# Altium PCB ANTS-MotorBoard.PcbDoc (part 1 of 3)
Units mm, origin at the board's own origin, x right, y up, seen from the top; angles counter-clockwise.
Board outline 50 x 50 mm, 2 copper layers (Top Layer, Bottom Layer); 2 components, 10 nets, 26 pads, 0 vias.
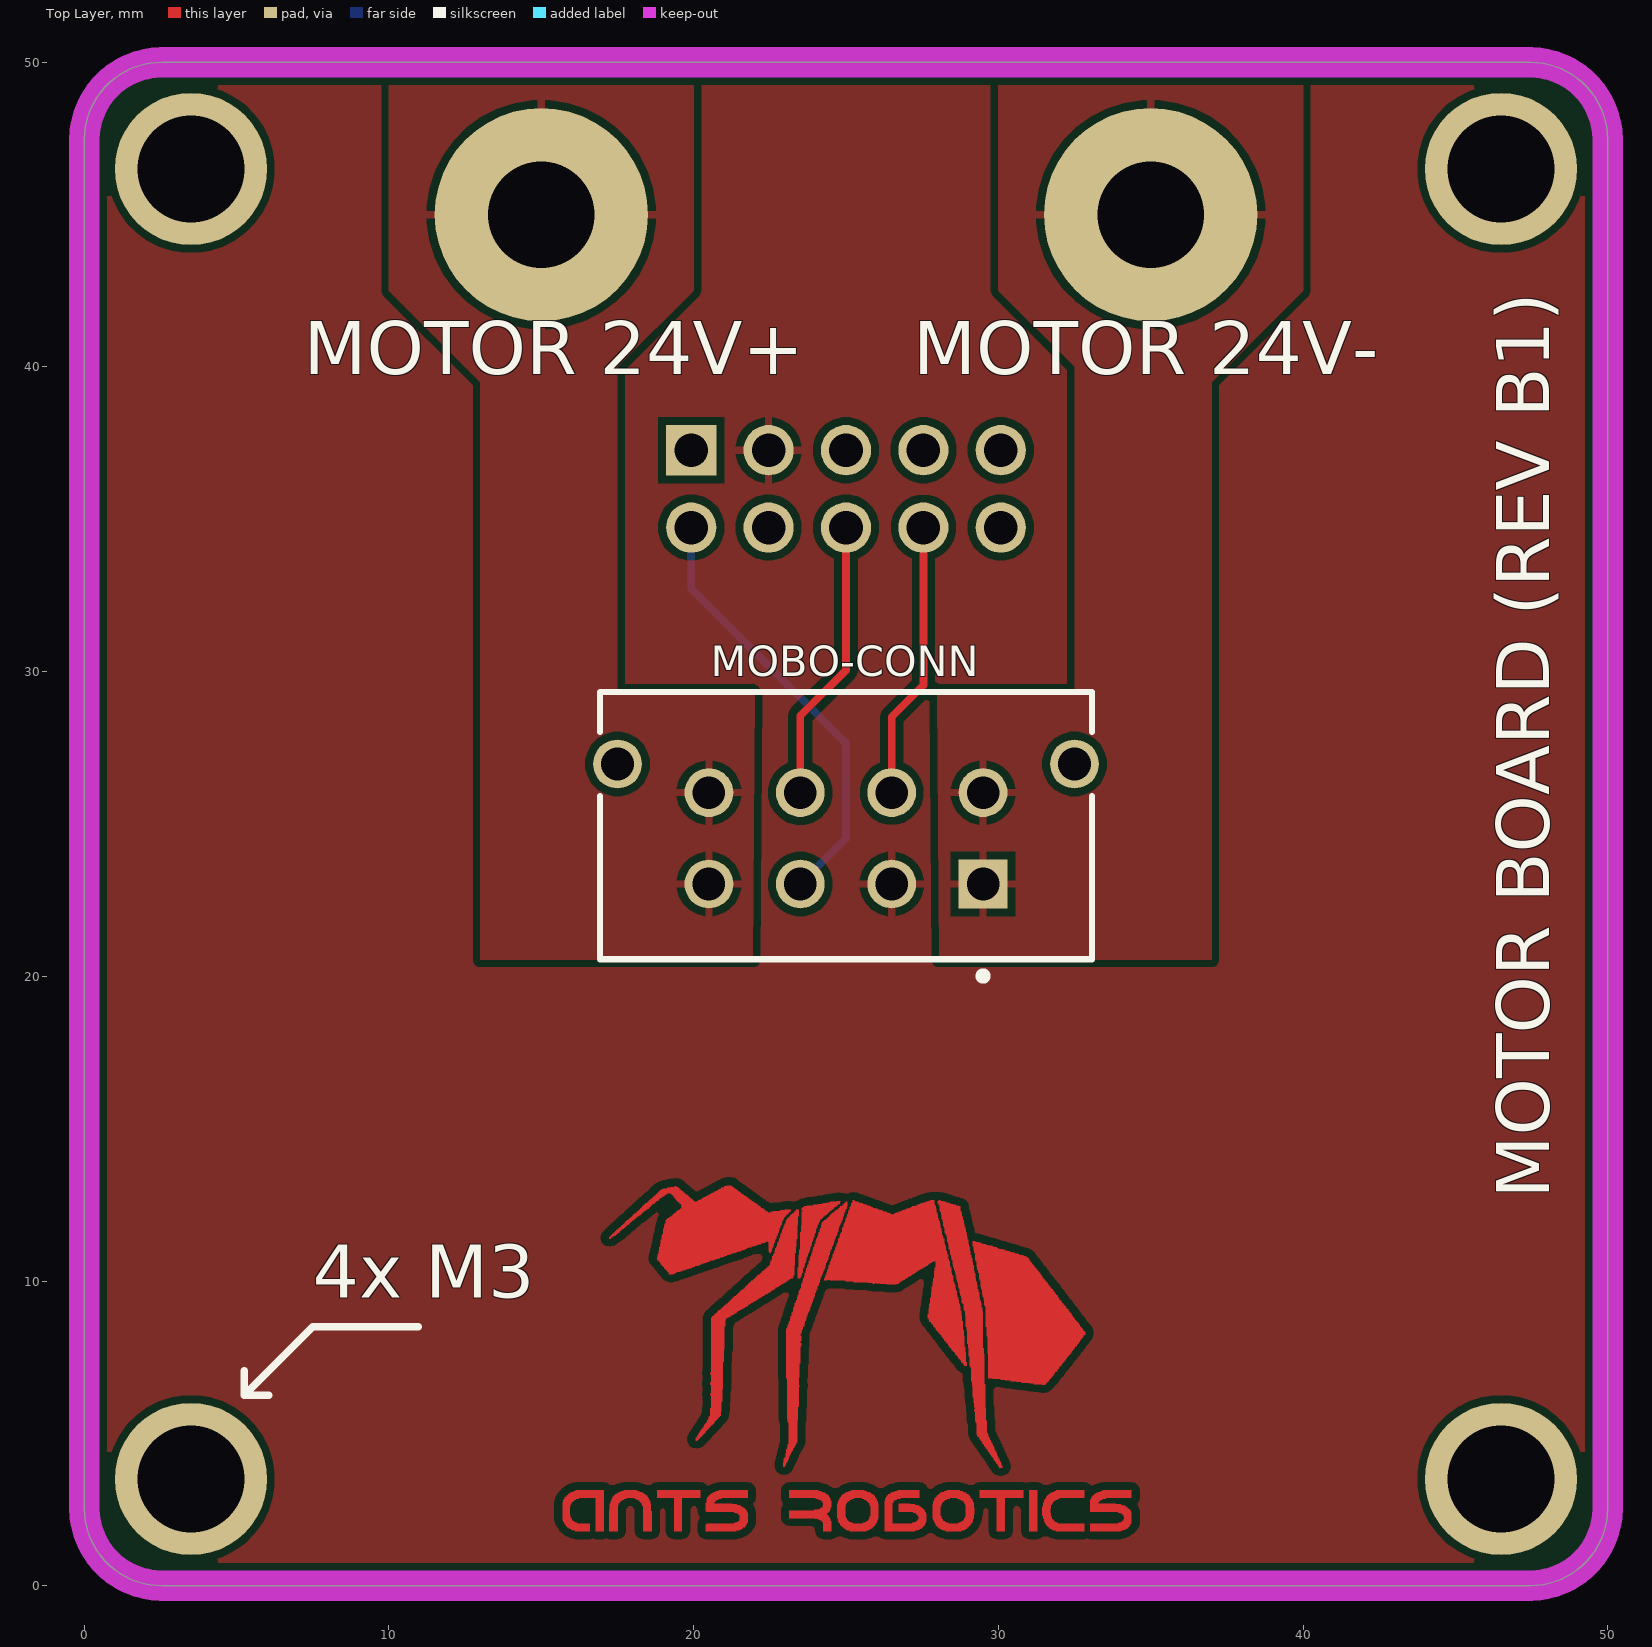
[diagram p0: Top Layer view]
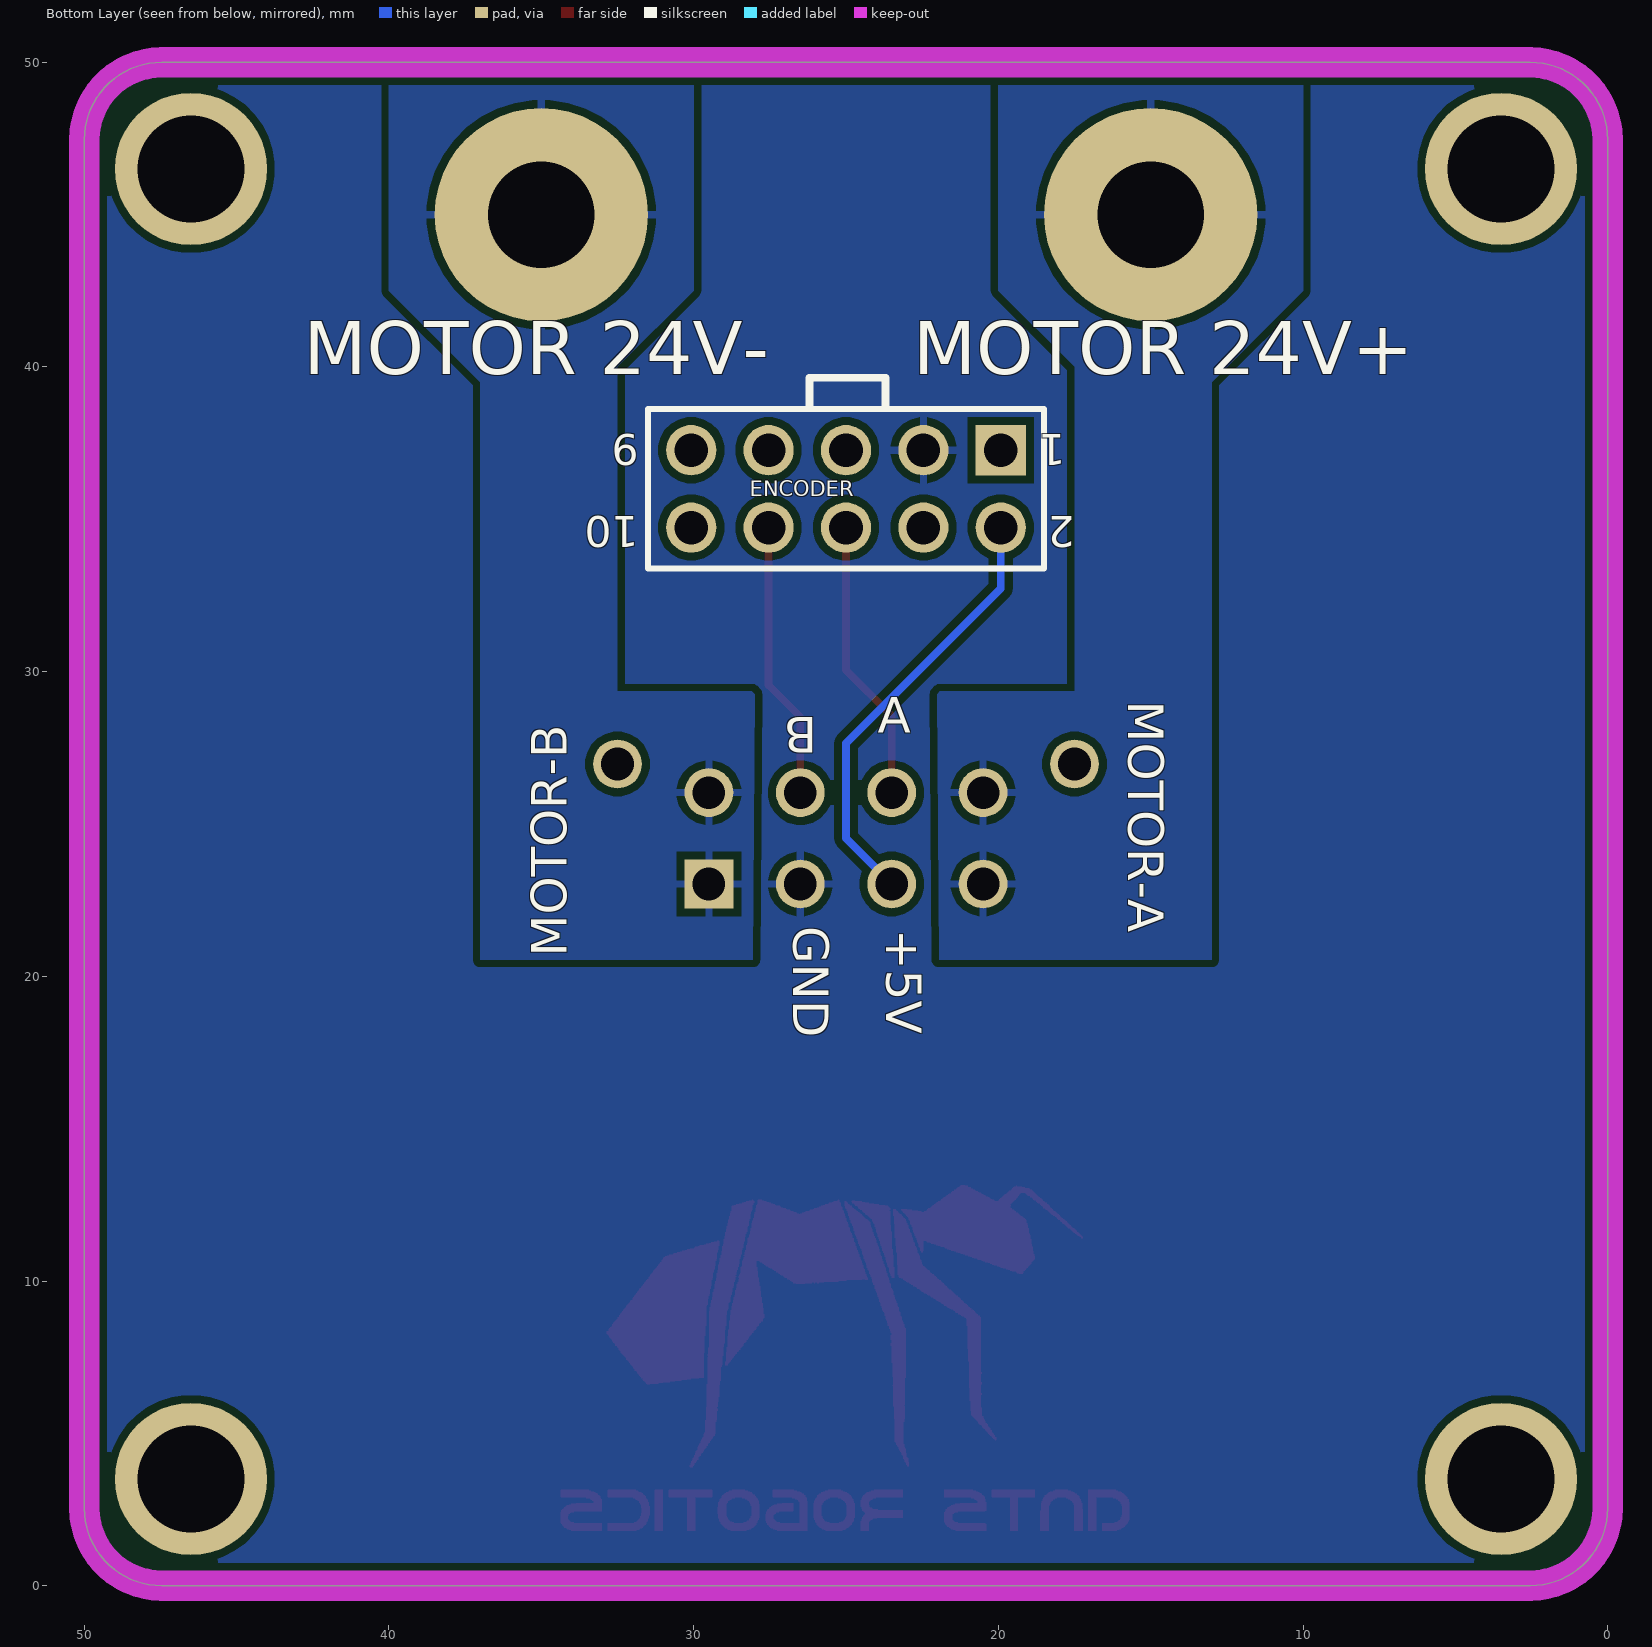
[diagram p1: Bottom Layer view, seen from below]

## Layer stack, top to bottom
Top Solder: solder mask 0.0102, Solder Resist, Dk 3.5
Top Layer: signal copper 0.0356
Dielectric 1: dielectric 0.32, FR-4, Dk 4.8
Bottom Layer: signal copper 0.0356
Bottom Solder: solder mask 0.0102, Solder Resist, Dk 3.5

## Board outline
47,0 47.46,0 ccw(c47.46,2.54) 50,2.54 50,3 50,47.46 ccw(c47.46,47.46) 47.46,50 47,50 3,50 2.54,50 ccw(c2.54,47.46) 0,47.46 0,2.54 ccw(c2.54,2.54) 2.54,0 3,0

## Design rules (kind name [scope] priority, off if disabled: settings)
Clearance [All] p1: gap=0.254 ignorepadtopadclearanceinfootprint=FALSE except(0: Arc-Hole Track-Hole SMDPad-Hole THPad-Hole Via-Hole Fill-Hole Poly-Hole Region-Hole Text-Hole)
PolygonConnect [All] p1: connectstyle=Relief reliefconductorwidth=0.254 reliefentries=4 polygonreliefangle="90 Angle" airgapwidth=0.254
RoutingVias [All] p1: holewidth=0.711 width=1.27 viastyle="Through Hole" minholewidth=0.711 minwidth=1.27 maxholewidth=0.711 maxwidth=1.27
SolderMaskExpansion [All] p1: expansion=0.102 istentingtop=FALSE
Width [All] p1: maxlimit=0.254 minlimit=0.254 preferedwidth=0.254
30 further rules are at their usual default settings.

## Components (designator, comment, footprint, x,y, rotation, side; value= is the part's Value field where it differs from the comment)
ENCODER "61301021121" 61301021121 25,36 r0 bottom
MOBO-CONN "43045-0812" MOLX-43045-0812_V 25,25 r180 top

## Footprints (in the part's own frame and the unit in brackets; to place one, negate y for a bottom-side part, rotate by r counter-clockwise, add the part's x,y. Pads: shape width x height; smd on the part's side, far side on the other; paste and mask are expansions set on the pad)
61301021121 [mm] "Pin Header, pitch 2.54 mm, THT, Vertical, dual row, 10p"
  rect 1.65x1.65 hole 1.1: 1(-5.08,-1.27)
  round 1.65 hole 1.1: 2(-5.08,1.27) 3(-2.54,-1.27) 4(-2.54,1.27) 5(0,-1.27) 6(0,1.27) 7(2.54,-1.27) 8(2.54,1.27) 9(5.08,-1.27) 10(5.08,1.27)
  silkscreen extent -6.5,-2.62 6.5,2.62, body extent -6.35,-2.54 6.35,2.54, height 8.59
MOLX-43045-0812_V [mm] "PCB Header, 8-Leads, Vertical, Pitch 3 mm, Mated Height 17.27 mm, Through Hole"
  rect 1.6x1.6 hole 1.07: 1(-4.5,1.97)
  round 1.6 hole 1.07: 2(-1.5,1.97) 3(1.5,1.97) 4(4.5,1.97) 5(-4.5,-1.03) 6(-1.5,-1.03) 7(1.5,-1.03) 8(4.5,-1.03) MH1(-7.5,-1.97) MH2(7.5,-1.97)
  silkscreen extent -8.08,-4.33 8.08,5.11, body extent -8.08,-4.33 8.08,4.44, height 9.91

## Part data
ENCODER: library part CMP-1502-01084-1, "THT Vertical Pin Header WR-PHD, Pitch 2.54 mm, Dual Row, 10 pins", Contact Resistance=20mOhm, Manufacturer="Wurth Elektronik", Operating Temperature=-40to105degC, Rated Current=3A, Withstanding Voltage=500VAC, Working Voltage=250VAC, Datasheet URL=https://katalog.we-online.de/em/datasheet/6130xx21121.pdf, Gender=Male, Manufacturer URL=http://www.we-online.de, Mounting Technology=THT, Orientation=Vertical, Package Reference=61301021121, Packaging=Bag, Part Number=61301021121, Pin Number=10, Pitch=2.54mm, Publisher=WurthElektronik, Row Number=Dual
MOBO-CONN: library part CMP-1594-00003-1, "3 mm Pitch Micro-Fit 3.0 Connector, 17.27 mm Mated Height, Vertical, Through Hole, 8 Circuits, -40 to 105 degC, RoHS, Tray", Temperature Max="105 degC", Temperature Min="-40 degC", ComponentLink1Description="Manufacturer URL", ComponentLink1URL=http://www.molex.com/, ComponentLink2Description=Datasheet, ComponentLink2URL=http://www.molex.com/webdocs/datasheets/pdf/en-us/0430450812_PCB_HEADERS.pdf, ComponentLink3Description="Package Specification", ComponentLink3URL=http://www.molex.com/pdm_docs/sd/430450812_sd.pdf, Mounting Technology="Through Hole", No. of Positions=8, No. of Rows=2, Orientation=Vertical, PackageDescription="8-Pin PCB Header, Vertical, Pitch 3 mm, Mated Height 17.27 mm, Through Hole", PackageVersion="Rev. F, 06/2009", Packing=Tray, PartNumber=43045-0812, Pitch="3 mm", RoHS=TRUE

## Free pads (board coordinates)
  round 7 hole 3.5: 3(15,45) 3(35,45)
  round 5 hole 3.5: 5(3.5,3.5) 5(3.5,46.5) 5(46.5,3.5) 5(46.5,46.5)

## Nets (pads, with @x,y where several pads share a name; then routed paths per layer and width w, separated by ;. In a path a pad name is that pad's centre, name@x,y a point inside that pad or via, vN(x,y) a via of type N, cw(c..) or ccw(c..) an arc to the next point about the centre after c; other vN are vias at no path point)
+5V: ENCODER.2 MOBO-CONN.3 | length 14.6
  Top Layer w0.254: ENCODER.2@19.85,34.75 ENCODER.2@19.87,34.73 ; ENCODER.2@19.92,34.68 ENCODER.2@19.87,34.73 ; ENCODER.2@19.92,34.73 ENCODER.2@19.87,34.73
  Bottom Layer w0.254: ENCODER.2@19.92,34.73 19.92,32.73 25,27.65 25,24.53 MOBO-CONN.3@23.5,23.03
A: ENCODER.6 MOBO-CONN.7 | length 9.3
  Top Layer w0.254: MOBO-CONN.7@23.5,26.03 23.5,26.1 23.5,28.55 25,30.05 ENCODER.6@25,34.73
Anot: ENCODER.5
B: ENCODER.8 MOBO-CONN.6 | length 9.1
  Top Layer w0.254: MOBO-CONN.6@26.5,26.065 26.5,28.515 27.54,29.555 ENCODER.8@27.54,34.73
Bnot: ENCODER.7
GND: ENCODER.3 MOBO-CONN.2
I: ENCODER.10 | length 0.2
  Bottom Layer w0.254: ENCODER.10@29.95,34.6 ENCODER.10@30.08,34.73
Inot: ENCODER.9
MOTOR-CHA: MOBO-CONN.4 MOBO-CONN.8 pad.3@15,45
MOTOR-CHB: MOBO-CONN.1 MOBO-CONN.5 pad.3@35,45
pads on no net: ENCODER.1 ENCODER.4 MOBO-CONN.MH1 MOBO-CONN.MH2
copper on no net: | length 2065